# Altium PCB PCB1.PcbDoc
Units mil, origin at the board's own origin, x right, y up, seen from the top; angles counter-clockwise.
Board outline 3600.61 x 1577.03 mil, 2 copper layers (Top Layer, Bottom Layer); 52 components, 49 nets, 192 pads, 25 vias.
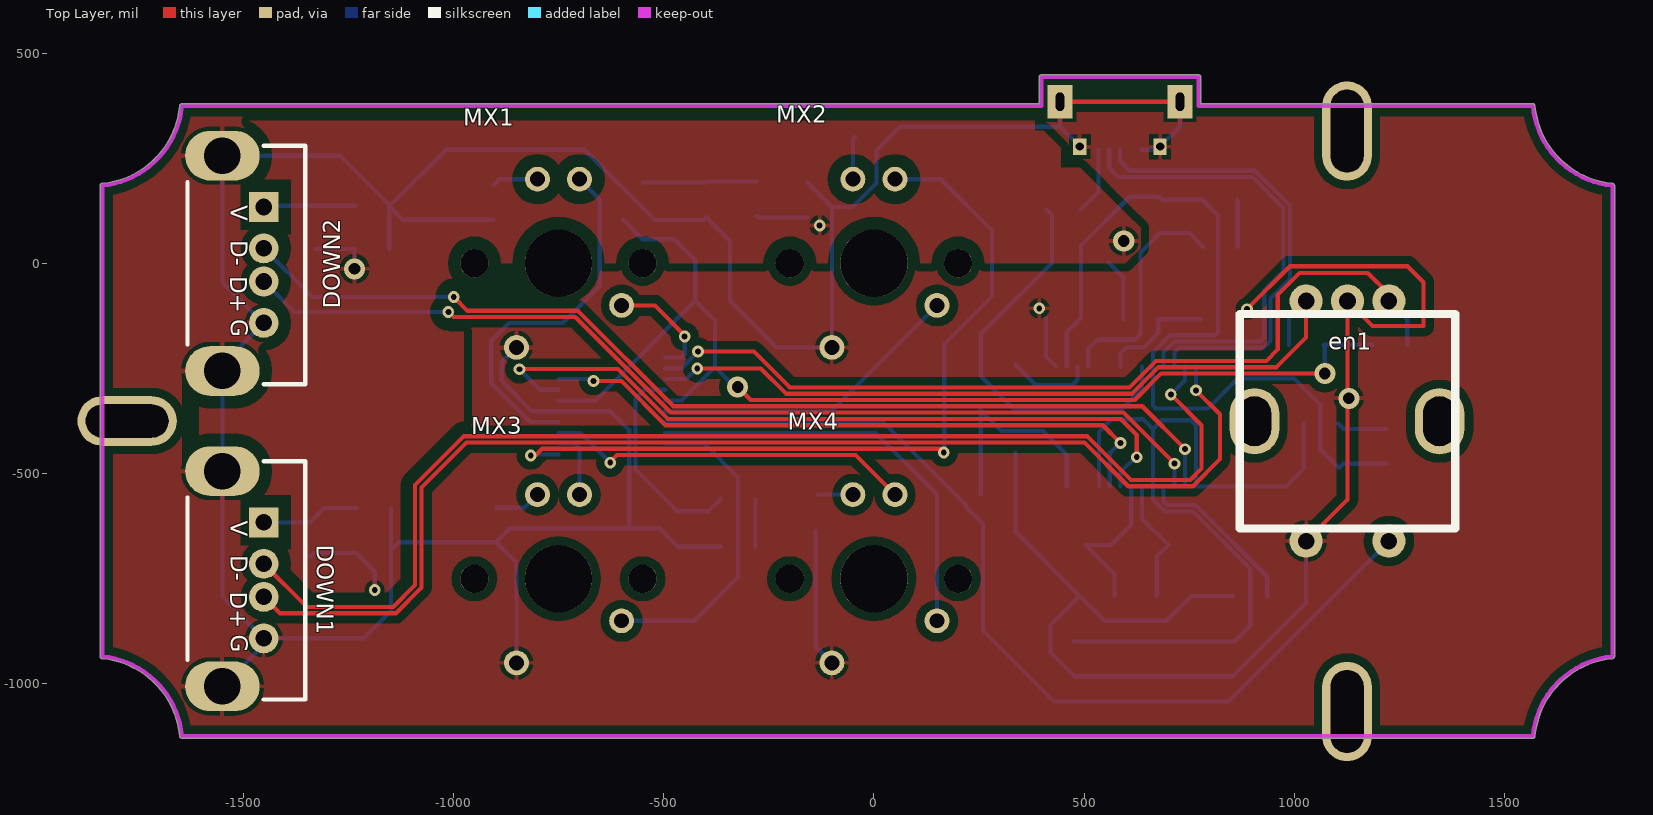
[diagram p0: Top Layer view]
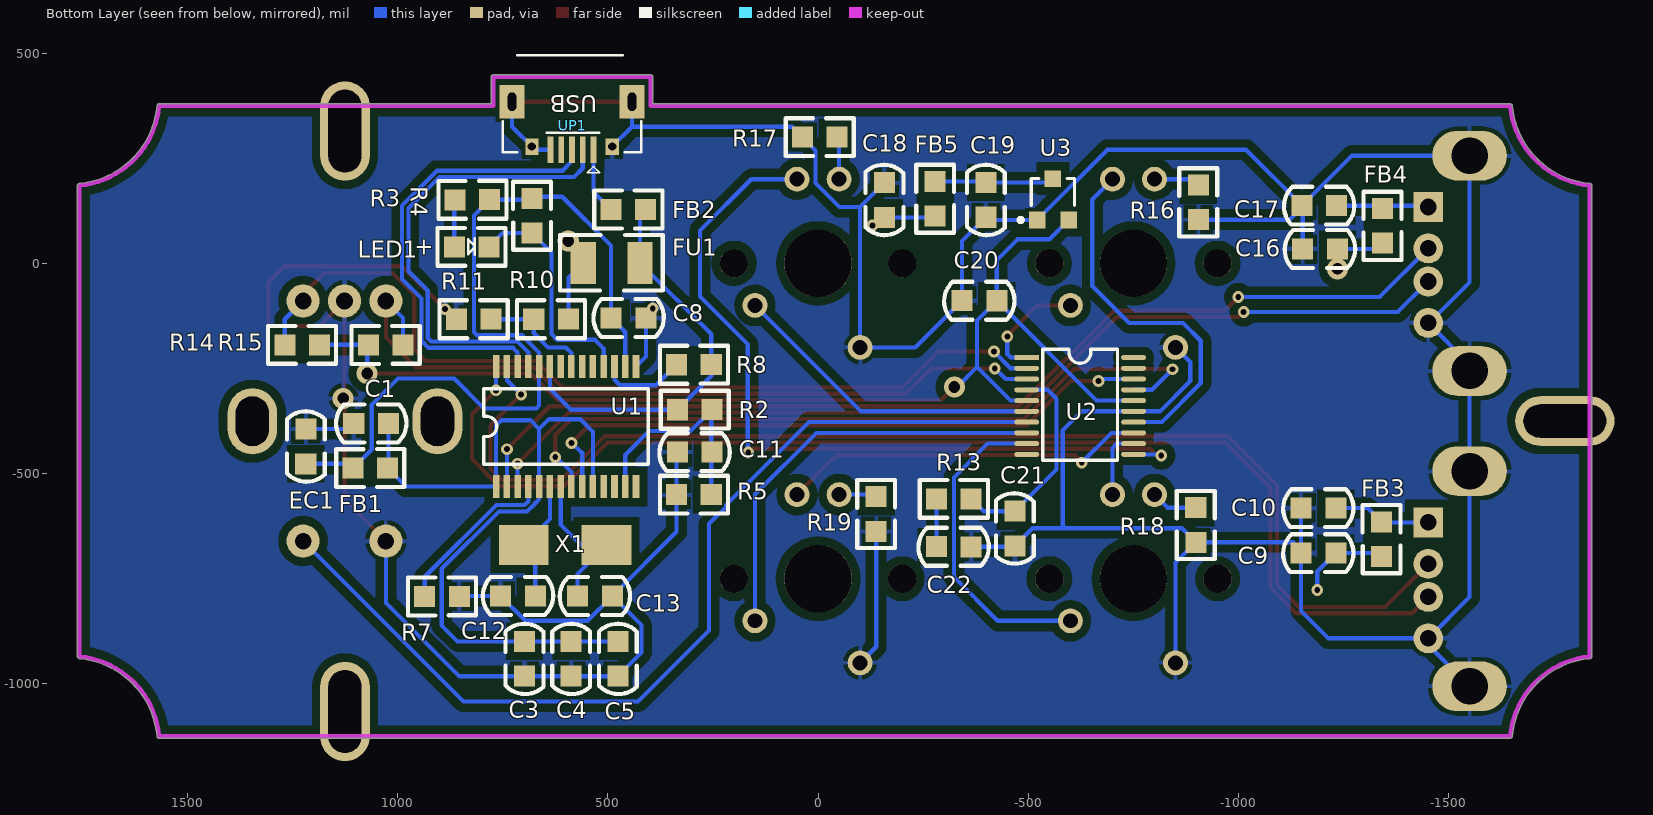
[diagram p1: Bottom Layer view, seen from below]
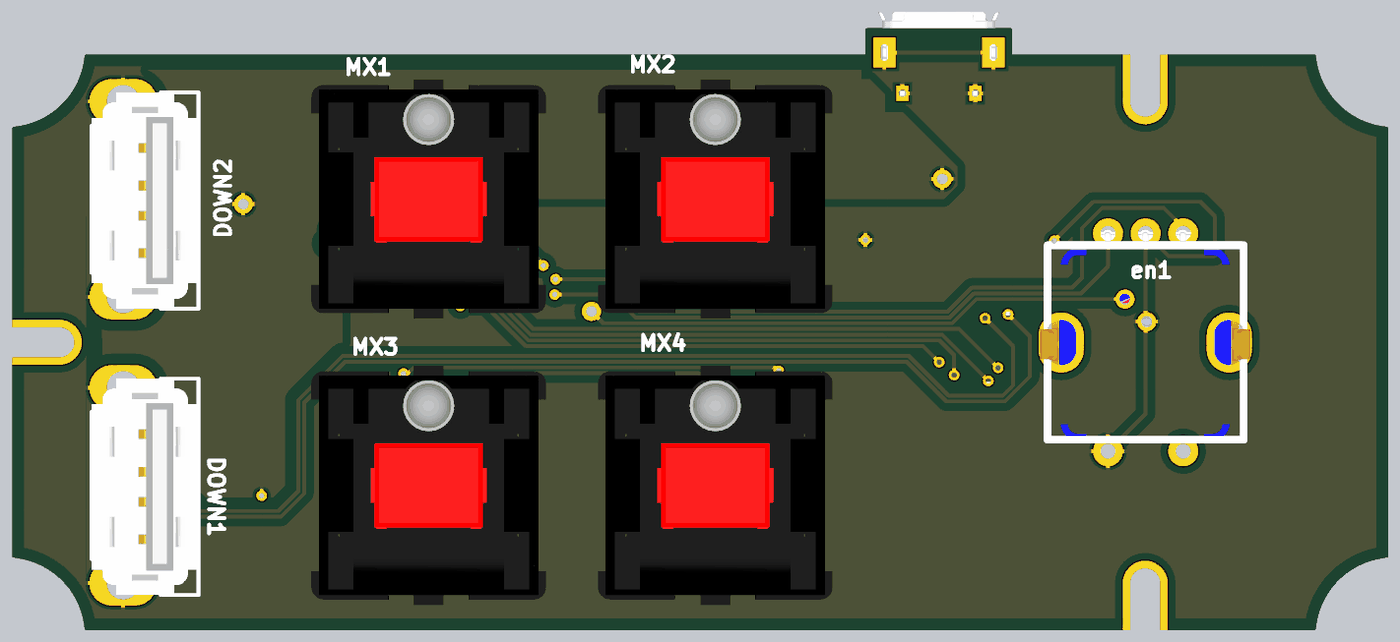
[diagram p2: 3D render of the assembled board from above, using the file's embedded part models]
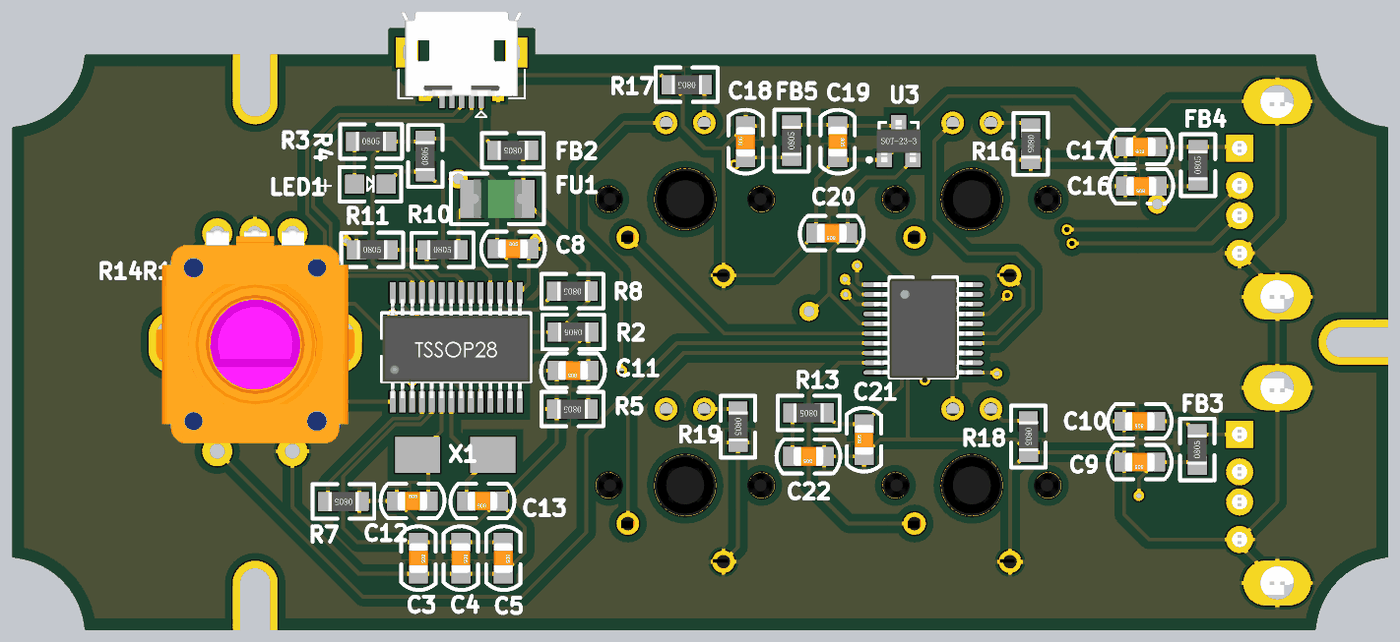
[diagram p3: 3D render of the assembled board from below, using the file's embedded part models]

## Layer stack, top to bottom
Top Solder: solder mask 0.4, Solder Resist, Dk 3.5
Top Layer: signal copper 1.4
Dielectric 1: dielectric 12.6, FR-4, Dk 4.8
Bottom Layer: signal copper 1.4
Bottom Solder: solder mask 0.4, Solder Resist, Dk 3.5

## Board outline
-1839.7,-934.84 ccw(c-1834.69,-934.84) -1835.16,-939.83 cw(c-1854.37,-1143.69) -1650.51,-1124.48 ccw(c-1645.52,-1124.01) -1645.4,-1129.02 1566.72,-1129.02 ccw(c1566.72,-1124) 1571.72,-1124.47 cw(c1775.58,-1143.69) 1756.36,-939.83 ccw(c1755.89,-934.84) 1760.91,-934.84 ccw(c1755.89,-934.84) 1760.91,-934.8 1760.91,184.89 ccw(c1755.89,184.89) 1756.36,189.88 cw(c1775.58,393.74) 1571.72,374.53 ccw(c1566.72,374.06) 1570.27,377.6 ccw(c1566.72,374.06) 1566.72,379.07 777.26,379.07 777.26,443 ccw(c772.24,443) 772.24,448.01 397.76,448.01 ccw(c397.76,443) 392.74,443 392.74,379.07 -1645.52,379.07 ccw(c-1645.52,374.06) -1650.51,374.53 cw(c-1854.37,393.74) -1835.16,189.88 ccw(c-1834.69,184.89) -1839.7,184.89 ccw(c-1834.69,184.89) -1839.7,184.89

## Design rules (kind name [scope] priority, off if disabled: settings)
Clearance [All] p1: gap=5
PolygonConnect [All] p1: connectstyle=Relief reliefconductorwidth=10 reliefentries=4 polygonreliefangle="90 Angle" airgapwidth=10
RoutingVias [All] p1: holewidth=28 width=50 viastyle="Through Hole" minholewidth=28 minwidth=50 maxholewidth=28 maxwidth=50
SolderMaskExpansion [All] p1: expansion=4
Width [All] p1: maxlimit=50 minlimit=10 preferedwidth=10 minimp=50.000000 maximp=50.000000 favimp=50.000000
30 further rules are at their usual default settings.

## Components (designator, comment, footprint, x,y, rotation, side; value= is the part's Value field where it differs from the comment)
C1 "100nf" C0805 1110,-381 r180 bottom
C3 "0.1uF" C0805 698,-893 r270 bottom
C4 "0.1uF" C0805 587,-893 r270 bottom
C5 "0.1uF" C0805 476,-893 r270 bottom
C8 "0.1uF" C0805 498,-130 r180 bottom
C9 "100uf" C0805 -1237,-689 r0 bottom
C10 "0.1uf" C0805 -1237,-582 r0 bottom
C11 "0.1uF" C0805 246,-449 r0 bottom
C12 "20pF" C0805 761,-791 r180 bottom
C13 "20pF" C0805 483,-791 r0 bottom
C16 "100uf" C0805 -1241,34 r0 bottom
C17 "0.1uf" C0805 -1239,137 r0 bottom
C18 "100uf" C0805 -158,103 r90 bottom
C19 "0.1uf" C0805 -399,198.22 r270 bottom
C20 "0.1uF" C0805 -431,-89 r0 bottom
C21 "0.1uF" C0805 -468,-678 r90 bottom
C22 "0.1uF" C0805 -370,-674 r0 bottom
DOWN1 "USB" USB-A/S_D -1500,-750 r270 top
DOWN2 "USB" USB-A/S_D -1500,0 r270 top
EC1 "10uf" C0805 1218,-388 r270 bottom
en1 "encoder" "RES ADJ-EC12" 1125,-375 r180 top
FB1 "" R0805 1106,-487 r180 bottom
FB2 "" R0805 410,128 r0 bottom
FB3 "" R0805 -1340,-697 r90 bottom
FB4 "" R0805 -1342,48 r90 bottom
FB5 "" R0805 -278.5,112.28 r90 bottom
FU1 "6V/2A" FUSE-F1210 491,1 r0 bottom
LED1 "LED" LED0805 865,39 r180 bottom
MX1 "" MX_SW-5 -750,0 r180 top
MX2 "" MX_SW-5 0,0 r180 top
MX3 "" MX_SW-5 -750,-750 r180 top
MX4 "" MX_SW-5 0,-750 r180 top
R2 "10k" R0805 252,-348 r0 bottom
R3 "470" R0805 863,151 r180 bottom
R4 "100" R0805 680,72 r90 bottom
R5 "47k" R0805 254,-550 r0 bottom
R7 "680" R0805 853,-792 r0 bottom
R8 "510k" R0805 254,-241 r0 bottom
R10 "10k" R0805 676,-133 r180 bottom
R11 "20k" R0805 860,-133 r180 bottom
R13 "10k" R0805 -364,-560 r0 bottom
R14 "10k" R0805 1268,-194 r180 bottom
R15 "10k" R0805 987,-194 r0 bottom
R16 "331" R0805 -904,186 r270 bottom
R17 "331" R0805 -45,300 r0 bottom
R18 "331" R0805 -898,-581 r270 bottom
R19 "331" R0805 -138,-555 r270 bottom
U1 "GL850" SSOP28 603,-388 r90 bottom
U2 "stm32f042Fx" TSSOP20 -496,-224 r180 bottom
U3 "XC6206" SOT23-3 -556,148 r180 bottom
UP1 "USB" USB-micro_B 585,384.17 r0 bottom
X1 "XTAL" X5032 700,-670 r180 bottom

## Footprints (in the part's own frame and the unit in brackets; to place one, negate y for a bottom-side part, rotate by r counter-clockwise, add the part's x,y. Pads: shape width x height; smd on the part's side, far side on the other; paste and mask are expansions set on the pad)
C0805 [mil]
  rect 50x50 smd: 1(6,0) 2(88.7,-0.1)
  silkscreen extent -36,-45 131,45, body extent 8,-25 87,25, height 30
FUSE-F1210 [mil]
  rect 60x100 smd: 1(-67.5,0) 2(67.5,0)
  silkscreen extent -122,-66 122,66, body extent -64,-51 63,51, height 27
LED0805 [mil] "1/8W"
  rect 50x50 smd: 1(0,0) 2(82.3,0.2)
  silkscreen extent -40,-45 122,45, body extent 2,-25 80,25, height 20
MX_SW-5 [mm] "with Fixation pins  1-Pole w/LED"
  round 1.5 hole 0.9: 1(-3.81,2.54) 2(2.54,5.08) 3(-1.27,-5.08) 4(1.27,-5.08)
  round 1.702 hole 1.702: ""(-5.08,0) ""(5.08,0)
  round 4.064 hole 4.064: ""(0,0)
  body extent -7.8,-7.95 7.8,7.96, height 14.9
R0805 [mil] "1/8W"
  rect 50x50 smd: 1(0,0) 2(82.3,0.2)
  silkscreen extent -40,-45 122,45, body extent 1,-24 80,25, height 22
"RES ADJ-EC12" [mm] "编码器"
  oval 3x4 hole 2 slot 3 at 90 deg: 0(-5.588,0.014) 0(5.588,0.014)
  round 2 hole 1: 1(-2.525,-7.25) 2(-0.025,-7.25) 3(2.475,-7.25) 4(-2.525,7.25) 5(2.475,7.25)
  silkscreen extent -6.54,-6.46 6.49,6.49, body extent -7,-7.5 7,6.75, height 20.05
SOT23-3 [mm]
  rect 1x1 smd: 1(-0.889,-1.143) 2(1.011,-1.143) 3(0.061,1.357)
  silkscreen extent -2.01,-1.27 1.36,1.36, body extent -1.39,-1.29 1.51,1.51, height 1.2
SSOP28 [mil]
  rect 55x15.75 smd: 1(-142.95,162.5) 2(-142.95,136.92) 3(-142.95,111.34) 4(-142.95,85.77) 5(-142.95,60.19) 6(-142.95,34.61) 7(-142.95,9.04) 8(-142.95,-16.54) 9(-142.95,-42.12) 10(-142.95,-67.69) 11(-142.95,-93.27) 12(-142.95,-118.85) 13(-142.95,-144.42) 14(-143,-170) 15(142.95,-170) 16(142.95,-144.42) 17(142.95,-118.85) 18(142.95,-93.27) 19(142.95,-67.69) 20(142.95,-42.12) 21(142.95,-16.54) 22(142.95,9.04) 23(142.95,34.62) 24(142.95,60.19) 25(142.95,85.77) 26(142.95,111.35) 27(142.95,136.92) 28(142.95,162.5)
  silkscreen extent -90,-199 90,192, body extent -134,-197 126,189, height 41
TSSOP20 [mm]
  rect 1.5x0.3 smd: 1(0,0)
  oval 1.5x0.3 smd: 2(0,-0.65) 3(0,-1.3) 4(0,-1.95) 5(0,-2.6) 6(0,-3.25) 7(0,-3.9) 8(0,-4.55) 9(0,-5.2) 10(0,-5.85) 11(6.454,-5.85) 12(6.454,-5.2) 13(6.454,-4.55) 14(6.454,-3.9) 15(6.454,-3.25) 16(6.454,-2.6) 17(6.454,-1.95) 18(6.454,-1.3) 19(6.454,-0.65) 20(6.454,0)
  silkscreen extent 0.97,-6.2 5.49,0.51, body extent -0.05,-6.22 6.5,0.38, height 1.2
USB-A/S_D [mm] "A型直插母头，"
  rect 1.8x1.8 hole 1: 1(-3.4,1.25)
  round 1.8 hole 1: 2(-0.9,1.25) 3(1.1,1.25) 4(3.6,1.25)
  oval 3x4.5 hole 2.2: 4(-6.5,-1.25) 4(6.5,-1.25)
  silkscreen extent -7.1,-3.35 7.3,3.75, body extent -7.11,-3.35 7.29,3.75, height 14
USB-micro_B [mm] "micro型USB ，5.7*7.8*2.5mm"
  rect 0.35x1.6 smd: 1(-1.3,2.9) 2(-0.65,2.9) 3(0,2.9) 4(0.65,2.9) 5(1.3,2.9)
  rect 1.5x2 hole 0.5 slot 1.1 at 90 deg: 5(-3.625,0) 5(3.625,0)
  rect 0.8x1 hole 0.5: 5(-2.425,2.71) 5(2.425,2.71)
  silkscreen extent -4.19,-2.79 4.19,4.3, body extent -4,-2.71 4,2.89, height 2.8
X5032 [mm]
  rect 3x2.4 smd: 1(0,0) 2(5,0)

## Part data
C1 EC1: library part CAP, "Capacitor"
C3 C4 C5 C8 C10 C11 C12 C13 C17 C19 C20 C21 C22: library part CAP
C9 C16 C18: library part 电解电容, "Capacitor"
DOWN1 DOWN2 UP1: "4 Pin Header"
FB1 FB2 FB3 FB4 FB5 R8 R10 R11 R16 R17 R18 R19: library part R
FU1: library part FUSE
MX1 MX2 MX3 MX4: library part MX_SW-7
R2 R3 R4 R5 R7 R13 R14 R15: library part RES
X1: "12M"

## Free pads (board coordinates)
  rrect100% 236.22x118.11 hole 78.74 slot 196.85 at 0 deg: 1(-1775.63,-374.97)
  rrect100% 118.11x236.22 hole 78.74 slot 196.85 at 90 deg: 1(1125,-1065.57) 1(1125,314.44)

## Via types
v1: diameter 28, hole 14, Top Layer to Bottom Layer, 20 vias
v2: diameter 50, hole 28, Top Layer to Bottom Layer, 5 vias

## Nets (pads, with @x,y where several pads share a name; then routed paths per layer and width w, separated by ;. In a path a pad name is that pad's centre, name@x,y a point inside that pad or via, vN(x,y) a via of type N, cw(c..) or ccw(c..) an arc to the next point about the centre after c; other vN are vias at no path point)
3V3: C20.1 R14.2 R15.2 U2.5 U2.16 U3.2 | length 2755.7
  Top Layer w10: v2(-324,-294) -293,-325 620,-325 683,-262 v2(1072,-262)
  Bottom Layer w10: U2.16 -662.36,-326.36 C20.1 ; U3.2 -549.8,57 -474,57 -425,8 C20.1 ; U2.5 -457.36,-326.36 -378,-247 ; v2(-324,-294) -331,-294 -378,-247 ; v2(1072,-262) R15.2@1072,-196.1 ; R14.2 R15.2@1069.7,-193.8 ; C20.1 -378,-136 -378,-247 ; R15.2@1069.7,-193.8 R15.2@1072,-196.1 ; R15.2@1069.7,-193.8 R15.2@1072,-196.1
AVDD1: C1.2 C3.1 C4.1 C5.1 FB1.2 U1.1 U1.5 U1.10 | length 2071.7
  Bottom Layer w10: C5.1 C4.1 C3.1 857,-899 895,-861 895,-726.21 758.79,-590 691.79,-590 673.77,-571.98 673.77,-571.77 663.19,-561.19 U1.5 663.19,-393.81 ; U1.10 535.31,-400.69 565.38,-370.62 640,-370.62 663.19,-393.81 ; FB1.2 FB1.2@1021.3,-489.2 ; 663.19,-393.81 684,-373 753,-373 765.5,-385.5 U1.1 979.55,-530.95 FB1.2@1021.3,-489.2 ; FB1.2@1021.3,-489.2 C1.2 FB1.2@1021.3,-489.2
B_VCC: FB2.1 FU1.1 R2.2 R8.1 U1.23 | length 962.5
  Bottom Layer w10: FB2.1 423.5,114.5 FU1.1 254,-168.5 R8.1 254,-267.9 R2.2 587.8,-348.2 637.62,-298.38 U1.23
BL: MX1.1 U2.1 | length 273.7
  Top Layer w10: MX1.1 -521,-100 -450,-171 v1(-450,-174)
  Bottom Layer w10: U2.1 -458,-224 -450,-216 v1(-450,-174)
DM0: U1.25 UP1.2 | length 1112
  Bottom Layer w10: UP1.2 559.41,226 580.41,205 899.79,205 974,130.79 974,-19 928,-65 928,-177.79 919.79,-186 715,-186 688.77,-212.23 U1.25
DM1: DOWN1.2 U1.27 | length 2921.3
  Top Layer w10: DOWN1.2 -1348.35,-817 -1143,-817 -1091,-765 -1091,-527 -975,-411 507,-411 611,-515 752,-515 779,-488 779,-385 v1(706,-312)
  Bottom Layer w10: v1(706,-312) 739.92,-278.08 U1.27
DM2: DOWN2.2 U1.2 | length 2477.5
  Top Layer w10: v1(-999,-80) -966,-113 -704,-113 -477,-340 638,-340 v1(739.92,-441.92)
  Bottom Layer w10: DOWN2.2 -1335.35,-80 v1(-999,-80) ; U1.2 v1(739.92,-441.92)
DM3: U1.8 U2.17 | length 1838.6
  Top Layer w10: v1@-842,-251 -608.43,-251 -489.43,-370 586.79,-370 625,-408.21 v1(625,-461)
  Bottom Layer w10: v1(-843,-252) -794.23,-300.77 U2.17 ; U1.8 586.46,-496.54 ; 586.46,-496.54 624,-459 586.46,-496.54
DM4: U1.11
DP0: U1.26 UP1.3 | length 1088.5
  Bottom Layer w10: UP1.3 585,243 608,220 906,220 989,137 989,-38 943,-84 943,-184 926,-201 725,-201 714.35,-211.65 U1.26
DP1: DOWN1.3 U1.28 | length 2971
  Top Layer w10: DOWN1.3 -1412.1,-832 -1136.79,-832 -1076,-771.21 -1076,-533.21 -968.79,-426 500.79,-426 604.79,-530 758.21,-530 823,-465.21 823,-359 v1(766,-302)
  Bottom Layer w10: v1@765.5,-303.5 U1.28 v1@765.5,-303.5
DP2: DOWN2.3 U1.3 | length 2382.1
  Top Layer w10: -1000,-128 -710.21,-128 -483.21,-355 593,-355 v1(714.34,-476.34)
  Bottom Layer w10: DOWN2.3 -1378.1,-116 v1(-1012,-116) ; U1.3 v1(714.34,-476.34)
DP3: U1.9 U2.18 | length 1512.5
  Top Layer w10: v1(-667,-280) -600.64,-280 -495.64,-385 544,-385 v1(586,-427)
  Bottom Layer w10: U2.18 -671.82,-275.18 v1(-667,-280) ; U1.9 560.88,-450.12 ; 562.88,-450.12 v1(586,-427)
DP4: U1.12
DVDD: C8.1 EC1.2 FB1.1 R3.2 R4.2 U1.16 U1.24 | length 2100
  Bottom Layer w10: U1.16 458.58,-163.42 C8.1 492,42 608.3,158.3 ; R4.2 R4.2@680.2,158.3 ; EC1.2 1116.3,-476.7 FB1.1 1061,-442 1061,-336 999,-274 865,-274 794,-345 670,-345 663.19,-338.19 U1.24 663.19,-211.81 704,-171 811,-171 818,-164 818,113.9 R3.2 R4.2@687.3,151.2 ; 608.3,158.3 R4.2@680.2,158.3 ; 608.3,158.3 R4.2@680.2,158.3 ; R4.2@680.2,158.3 R4.2@687.3,151.2 ; R4.2@680.2,158.3 R4.2@687.3,151.2
GND: C1.1 C3.2 C4.2 C5.2 C8.2 C9.2 C10.2 C11.2 C12.1 C13.1 C16.2 C17.2 C18.2 C19.2 C20.2 C21.1 C22.1 DOWN1.4 DOWN2.4 EC1.1 en1.2 en1.5 MX1.2 MX2.2 MX3.2 MX4.2 R5.2 R7.1 R11.1 R16.2 R17.2 R18.2 R19.2 U1.15 U2.15 U3.1 UP1.5 | length 11487.6
  Top Layer w10: UP1.5@442.28,384.17 UP1.5@727.72,384.17 ; v1@885,-107 v1(887,-109) 989,-7 1269,-7 1307,-45 1307,-149 1185.43,-149 en1.2 1126,-300 1126,-562.01 en1.5
  Bottom Layer w10: DOWN1.4@-1549.21,-1005.91 -1450.79,-907.48 DOWN1.4@-1450.79,-891.73 ; C16.2 C17.2@-1152.3,135.1 ; C10.2 C9.2@-1148.3,-682 ; R16.2 -1120.9,103.7 C17.2@-1152.3,135.1 ; MX3.2 -850,-711.5 R18.2 ; MX1.2 -885,-235 -885,-280 -813.05,-351.95 U2.15 -626.05,-351.95 -582,-396 -582,-623 -589,-630 ; C22.1 -466,-674 C21.1 -510,-630 -589,-630 ; C18.2 -100,133.6 ; R19.2 -138.2,-911.8 MX4.2 ; C11.2@336.3,-450.5 R5.2 336.3,-638.3 C13.1 ; C8.2 409.3,-221.35 U1.15 ; UP1.5@442.28,384.17 442.28,324.72 ; UP1.5@489.53,277.48 442.28,324.72 ; UP1.5@636.18,270 672.99,270 680.47,277.48 727.72,324.72 UP1.5@727.72,384.17 ; R7.1 852,-791 C12.1 696,-850 548,-850 C13.1 ; en1.5 1027.57,-807.43 853.3,-981.7 C3.2 C4.2 C5.2 420,-925.6 420,-860 C13.1 ; C1.1 1117,-394 EC1.1 ; DOWN1.4@-1450.79,-891.73 -1549.21,-793.31 -1549.21,-494.09 -1549.21,-255.91 -1549.21,-240.16 -1450.79,-141.73 -1452.69,-141.73 -1549.21,-45.21 -1549.21,255.91 -1269.11,255.91 C17.2 ; DOWN1.4@-1450.79,-891.73 -1213.73,-891.73 -1148.3,-826.3 C9.2 C9.2@-1148.3,-682 ; C17.2@-1152.3,135.1 C17.2 ; C17.2 -1017.4,270 -688,270 U3.1 -405.42,103 C19.2 -342.3,52.92 C20.2 -231.2,-200 MX2.2 -100,133.6 ; C9.2@-1148.3,-682 -1129.6,-663.3 R18.2 ; R18.2 -864.9,-630 -589,-630 ; -100,133.6 -51.4,133.6 6,191 6,268.5 R17.2 62.22,324.72 442.28,324.72
  other v1: 393,-107
  other v2: 1129,-321
NetC10_1: C10.1 DOWN1.1 FB3.2 | length 233.9
  Bottom Layer w10: DOWN1.1 -1341.24,-616.14 FB3.2 -1307.1,-582 C10.1
NetC17_1: C17.1 DOWN2.1 FB4.2 | length 429.3
  Bottom Layer w10: DOWN2.1@-1447.65,137 C17.1 DOWN2.1@-1447.65,137
NetC21_2: C21.2 R13.1 U2.4 | length 504.3
  Bottom Layer w10: U2.4 -545.77,-300.77 -567,-322 -567,-490.4 C21.2 -393.3,-589.3 R13.1
NetC22_2: C22.2 R13.2 | length 113.3
  Bottom Layer w10: C22.2 R13.2@-281.3,-560.6
NetFB2_2: FB2.2 UP1.1 | length 159.4
  Bottom Layer w10: FB2.2 533.82,169.32 UP1.1
NetLED1_1: LED1.1 R3.1 | length 112.8
  Bottom Layer w10: R3.1 865,149 LED1.1
NetMX1_4: MX1.4 R16.1 | length 109.8
  Bottom Layer w10: R16.1 -890,200 MX1.4
NetMX2_4: MX2.4 R17.1 | length 102.1
  Bottom Layer w10: MX2.4 -50,295 R17.1
NetMX3_4: MX3.4 R18.1 | length 110.8
  Bottom Layer w10: R18.1 -831,-581 MX3.4
NetMX4_4: MX4.4 R19.1 | length 83
  Bottom Layer w10: R19.1@-133,-550 MX4.4
OVCUR1#: R10.1 R11.2 U1.21 | length 275.5
  Bottom Layer w10: U1.21 586.46,-213.54 600,-200 642,-200 676,-166 R10.1 676.2,-132.8 R11.2
PA0: MX2.1 U2.6 | length 750.4
  Bottom Layer w10: U2.6 -101.95,-351.95 MX2.1
PA1: en1.4 U2.7 | length 2304.8
  Bottom Layer w10: U2.7 21.54,-377.54 219,-575 219,-579.14 259,-619.14 259,-873 428,-1042 842.86,-1042 en1.4
PA2: MX4.1 U2.8 | length 1007.4
  Bottom Layer w10: U2.8 4.13,-403.13 150,-549 MX4.1
PA3: MX3.1 U2.9 | length 763.3
  Bottom Layer w10: MX3.1 -427,-850 -323,-746 -323,-509 -403.28,-428.72 U2.9
PA4: U2.10
PA5: MX2.3 U2.11 | length 2176.5
  Top Layer w10: v1(-816,-457) -805,-457 -789,-441 157,-441 v1(166,-450)
  Bottom Layer w10: v1(-816,-457) -813.32,-454.32 U2.11 ; MX2.3 159,200 281,78 281,-79 167,-193 ; v1(166,-450) v1@167,-451 ; v1@167,-451 167,-193 ; v1@167,-451 167,-193
PA6: MX3.3 U2.12 | length 165.3
  Bottom Layer w10: U2.12 -710.28,-428.72 -700,-439 MX3.3
PA7: MX4.3 U2.13 | length 877
  Top Layer w10: v1(-627,-474) -627,-472 -611,-456 -44,-456 MX4.3
  Bottom Layer w10: U2.13 -697.87,-403.13 v1(-627,-474)
PB1: MX1.3 U2.14 | length 885
  Bottom Layer w10: U2.14 -817.46,-377.54 -910,-285 -910,-184 -868,-142 -740,-142 -652,-54 -652,152 MX1.3
PF0: en1.1 R14.1 U2.2 | length 2120.4
  Top Layer w10: v1(-418,-210) -285,-210 -200,-295 607.57,-295 670.57,-232 933,-232 960,-205 960,-75 1012,-23 1174,-23 1224.43,-73.43 en1.1
  Bottom Layer w10: U2.2 -457.59,-249.59 v1(-418,-210) ; en1.1 1268,-133.14 R14.1
PF1: en1.3 R15.1 U2.3 | length 1822.3
  Top Layer w10: v1(-420,-250) -269,-250 -209,-310 613.79,-310 676.79,-247 957,-247 1027.57,-176.43 en1.3
  Bottom Layer w10: U2.3 -446.18,-275.18 -421,-250 v1(-420,-250) ; R15.1 987,-130.14 en1.3
PGANG: LED1.2 R4.1 U1.18 | length 556.6
  Bottom Layer w10: U1.18 509.73,-202.27 530,-182 620,-182 634,-168 634,26 R4.1 749.9,72 LED1.2
PSELF: R8.2 U1.17 | length 205.4
  Bottom Layer w10: R8.2 385.1,-290 471.15,-290 484.15,-277 U1.17
RESER#: C11.1 R2.1 R5.1 U1.13 | length 726.5
  Bottom Layer w10: R2.1 R2.1@254,-350 ; U1.13 458.58,-455.58 402,-399 303,-399 R2.1@254,-350 ; R2.1@254,-350 R5.1 R2.1@254,-350
RREF: R7.2 U1.4 | length 402.6
  Bottom Layer w10: U1.4 688.77,-565.77 698,-575 765,-575 935.3,-745.3 R7.2
SWC: U2.20
SWD: U2.19
TEST: U1.14
VDP1: C9.1 C16.1 C18.1 FB3.1 FB4.1 FB5.1 FU1.2 R10.2 | length 628.8
  Bottom Layer w10: FB3.1 -1332,-689 C9.1 -1187,-733 v1(-1187,-777) ; FB4.1@-1328,34 C16.1 v2(-1235,-13) ; FB5.1 -275.22,109 C18.1 ; FU1.2 593.7,-34.2 R10.2
  other v1: -129,90
  other v2: 594,53
VU_IN: C19.1 FB5.2 U3.3 | length 268.5
  Bottom Layer w10: U3.3@-549.19,192.22 C19.1 ; C19.1@-396.64,194.58 FB5.2
XTAL1: C12.2 U1.6 X1.1 | length 297.5
  Bottom Layer w10: U1.6 637.61,-607.61 X1.1 672.3,-697.7 C12.2
XTAL2: C13.2 U1.7 X1.2 | length 368.5
  Bottom Layer w10: C13.2 571.7,-738.55 X1.2 563,-670 612.04,-620.96 U1.7
pads on no net: en1.0 MX1. MX2. MX3. MX4. U1.19 U1.20 U1.22 UP1.4

## Polygon pours and split planes (outlines as drawn)
GND on Top Layer "Bottom Layer-No Net" (solid, remove dead copper, pour order 62): -1357,-1123 -1357,371.06 -1354,374.06 -1645.52,374.06 -1645.52,-1105.52 -1655,-1115
VDP1 on Top Layer "Bottom Layer-No Net" (solid, remove dead copper, pour order 42): -1645.52,374.06 -1645.52,-519.84 -1450.79,-714.57 -1354.35,-811 -1152,-811 -1091,-750 -1091,-527 -975,-411 -975,-153 -1012,-116 -1012,-62 -950,0 200,0 598,0 634,36 634,84 601,117 397.76,320.24 397.76,374.06
GND on Top Layer "Bottom Layer-No Net" (solid, remove dead copper, pour order 66): -1646,-1114 -1690,-1070 -1690,-1013 -1694,-1013 -1735,-972 -1766,-941 -1802,-941 -1828.52,-941 -1834.69,-934.83 -1834.69,184.89 -1774.11,184.89 -1748,211 -1699,260 -1688,260 -1688,292 -1655,325 -1645.52,334.48 -1645.52,374.06
GND on Top Layer "Bottom Layer-No Net" (solid, remove dead copper, pour order 68): -1361,-1105 1560,-1105 1563,-1108 1597,-1074 1597,-1043 1597,-1027 1628,-996 1659,-965 1679,-965 1709,-965 1732,-942 1748,-926 1755.89,-926 1755.89,184.89 1753.78,187 1711,187 1703,187 1685,205 1664,226 1660,226 1652,226 1640,238 1622,256 1618,256 1618,260 1597,281 1594,284 1594,301 1594,314 1579,329 1573,335 1573,357 1573,367.78 1566.72,374.06 397.76,374.06 397.76,305.24 645,58 602,15 579,15 -953,15 -980,-12 -993,-25 -993,-364 -993,-384 -1141,-532 -1380,-771 -1383,-771
GND on Bottom Layer "Bottom Layer-No Net" (solid, remove dead copper, pour order 70): 1566.72,374.06 1566.72,338.28 1571,334 1592,313 1592,288 1596,288 1640,244 1699.11,184.89 1755.89,184.89 1755.89,-934.84 1689.16,-934.84 1652,-972 1569,-1055 1569,-1094 1569,-1121.73 1566.72,-1124 -1645.52,-1124 -1645.52,-1066.48 -1681,-1031 -1748,-964 -1748,-957 -1773,-932 -1834.69,-932 -1834.69,180 -1771,180 -1705,246 -1657,294 -1657,341 -1645.52,352.48 -1645.52,374.06

## Keep-outs
Keep-Out Layer:
  lines w10: -1834.69,-934.84 cw(c-1854.37,-1143.69) -1645.52,-1124.01 1566.72,-1124 cw(c1775.58,-1143.69) 1755.89,-934.84 1755.89,184.89 cw(c1775.58,393.74) 1566.72,374.06 772.24,374.06 772.24,443 397.76,443 397.76,429.76 397.76,374.06 -1645.52,374.06 cw(c-1854.37,393.74) -1834.69,184.89 -1834.69,-934.83

## Text inside footprints (layer, text, board x,y; h text height)
DOWN1: Top Overlay "V" at -1529.79,-611.73 h40 r270; Top Overlay "G" at -1529.79,-882.73 h40 r270; Top Overlay "D+" at -1530.79,-780.73 h40 r270; Top Overlay "D-" at -1528.79,-694.73 h40 r270
DOWN2: Top Overlay "V" at -1529.79,138.27 h40 r270; Top Overlay "G" at -1529.79,-132.73 h40 r270; Top Overlay "D+" at -1530.79,-30.73 h40 r270; Top Overlay "D-" at -1528.79,55.27 h40 r270
LED1: Bottom Overlay "+" at 914,20 h40